# Altium PCB Multivib_Sheet1.PcbDoc
Units mil, origin at the board's own origin, x right, y up, seen from the top; angles counter-clockwise.
Board outline 1000 x 1300 mil, 2 copper layers (Top Layer, Bottom Layer); 11 components, 6 nets, 24 pads, 2 vias.
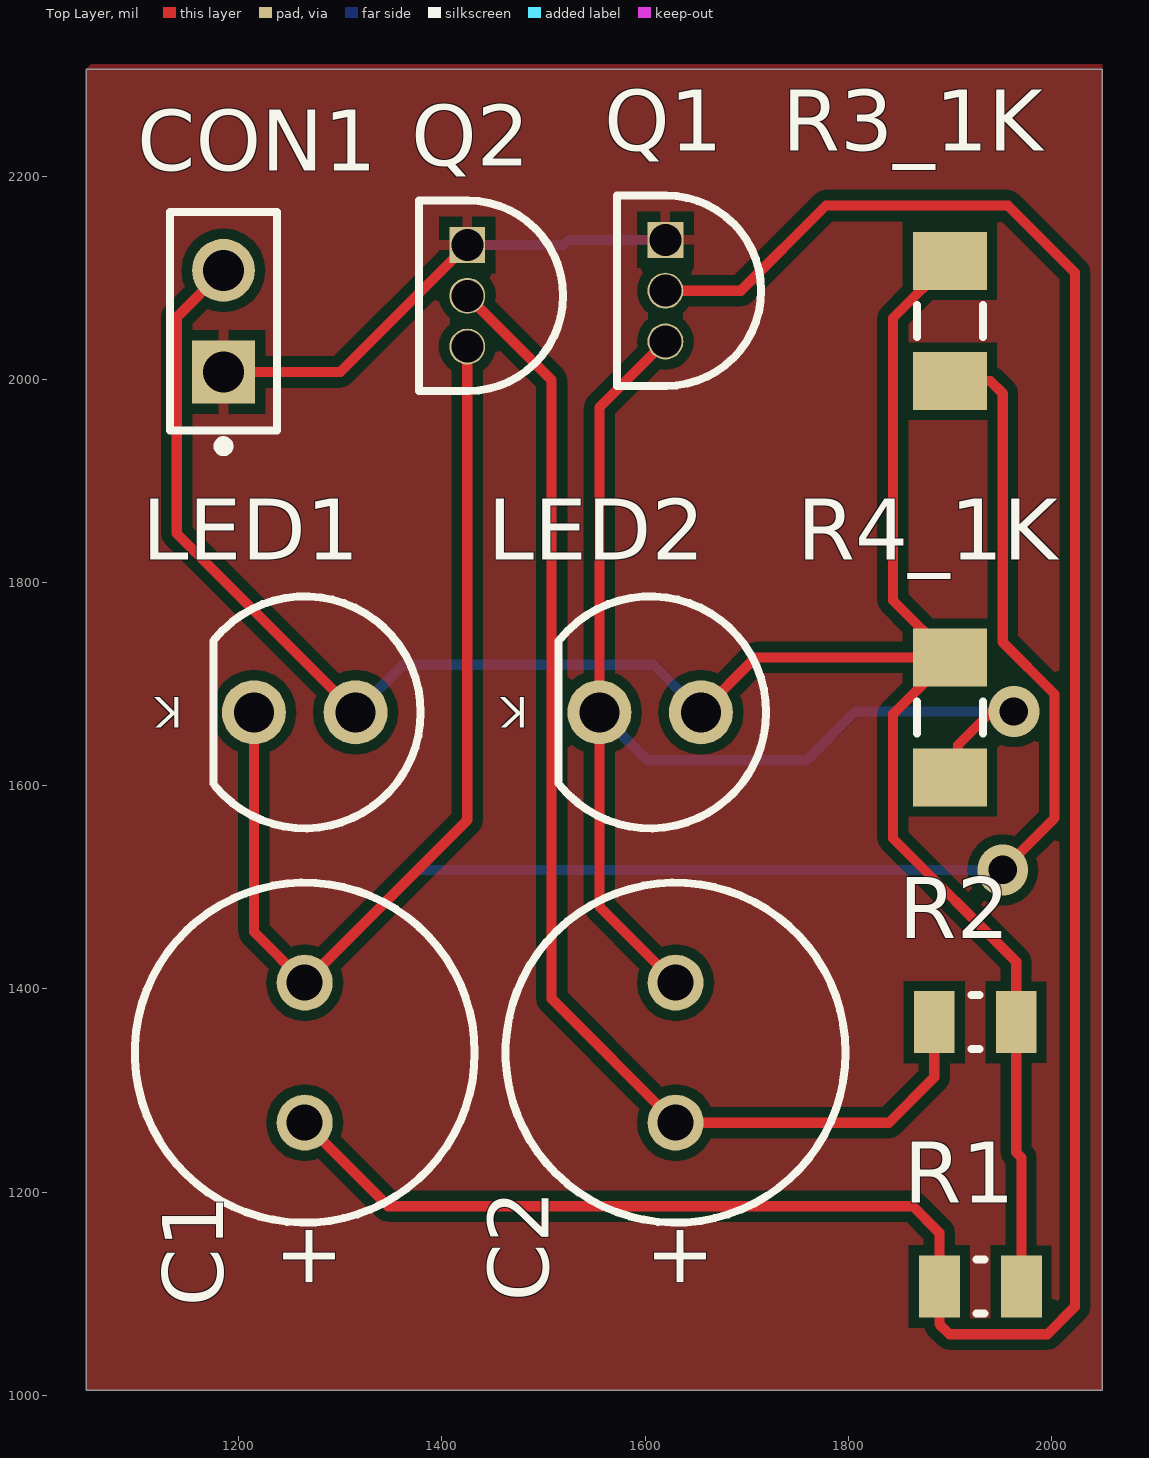
[diagram p0: Top Layer view]
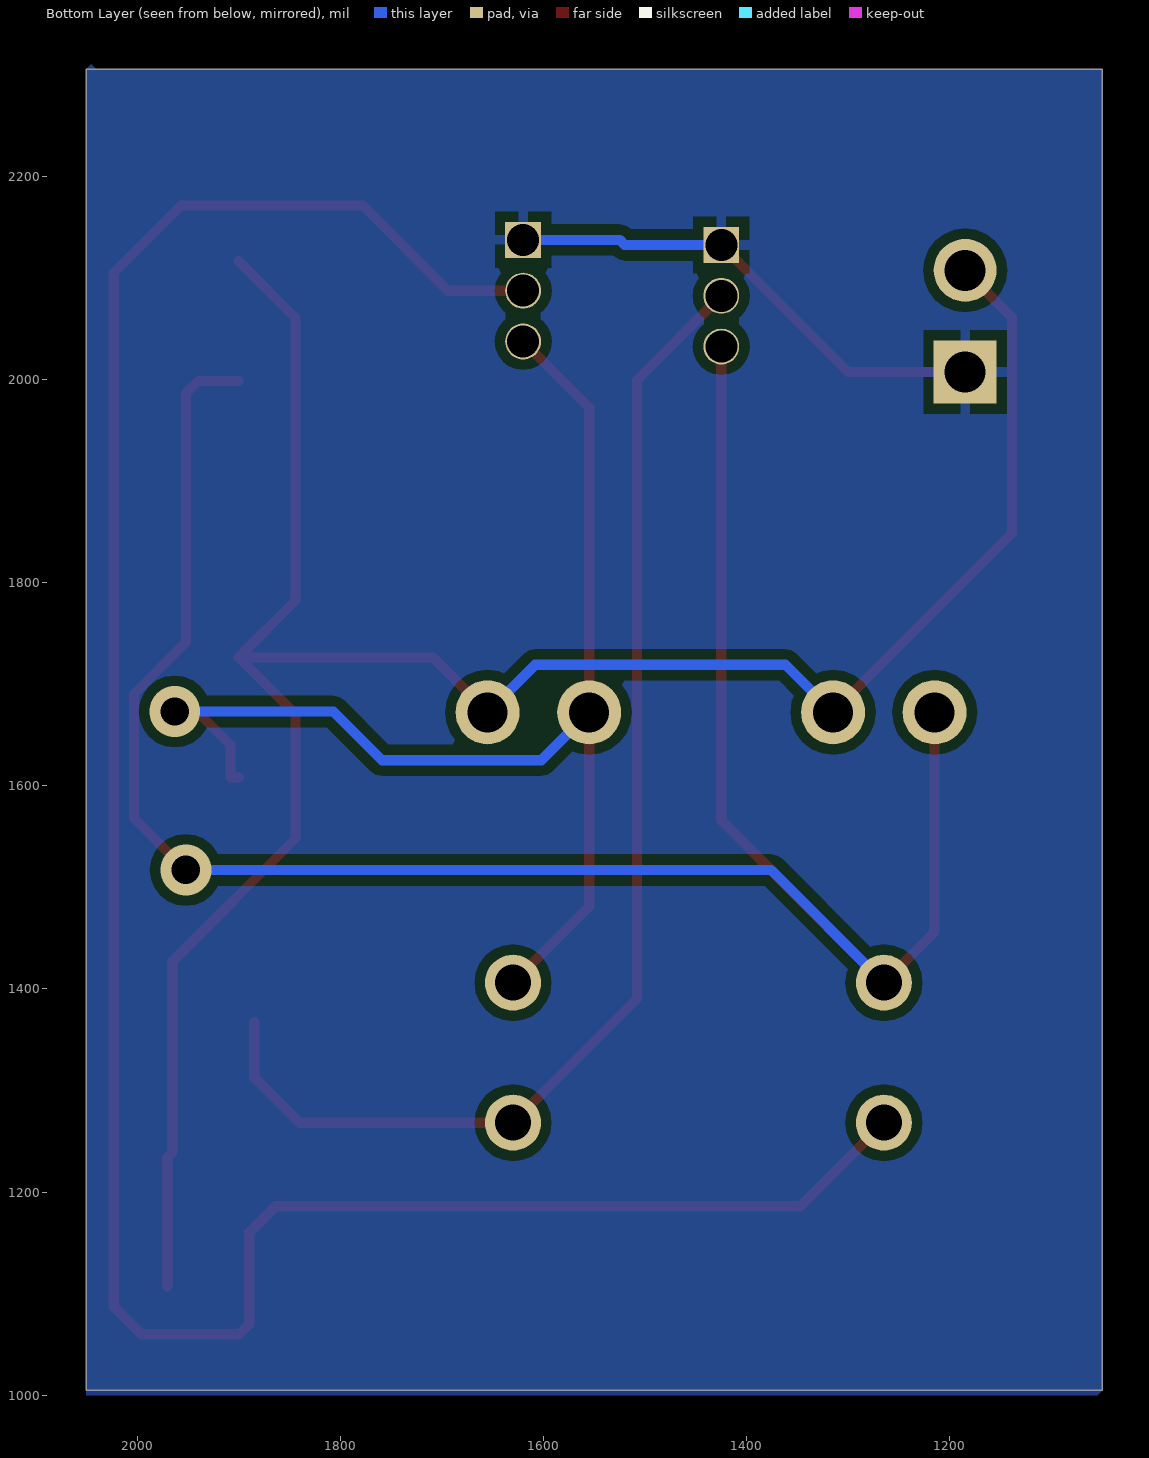
[diagram p1: Bottom Layer view, seen from below]

## Layer stack, top to bottom
Top Solder: solder mask 0.4, Solder Resist, Dk 3.5
Top Layer: signal copper 1.4
Dielectric 1: dielectric 12.6, FR-4, Dk 4.8
Bottom Layer: signal copper 1.4
Bottom Solder: solder mask 0.4, Solder Resist, Dk 3.5

## Board outline
1050,1005 2050,1005 2050,2305 1050,2305

## Design rules (kind name [scope] priority, off if disabled: settings)
Clearance [All] p1: gap=10 ignorepadtopadclearanceinfootprint=FALSE except(0: Arc-Hole Track-Hole SMDPad-Hole THPad-Hole Via-Hole Fill-Hole Poly-Hole Region-Hole Text-Hole)
PolygonConnect [All] p1: connectstyle=Relief reliefconductorwidth=10 reliefentries=4 polygonreliefangle="90 Angle" airgapwidth=10
RoutingVias [All] p1: holewidth=28 width=50 viastyle="Through Hole" minholewidth=28 minwidth=50 maxholewidth=28 maxwidth=50
SolderMaskExpansion [All] p1: expansion=4
Width [All] p1: maxlimit=10 minlimit=10 preferedwidth=10
30 further rules are at their usual default settings.

## Components (designator, comment, footprint, x,y, rotation, side; value= is the part's Value field where it differs from the comment)
C1 "ECA-1VM221" PNSC-ECA-1VM221-2 1265,1337.17 r90 top
C2 "ECA-1VM221" PNSC-ECA-1VM221-2 1630,1337.17 r90 top
CON1 "TSW-102-07-L-S" FP-TSW-102-07-L-S-MFG 1185,2057.17 r90 top
LED1 "151051RS11000" "Type 5mm" 1265,1672.17 r180 top
LED2 "151051RS11000" "Type 5mm" 1605,1672.17 r180 top
Q1 "2N3904BU" FAIR-TO-92 1620,2137.17 r270 top
Q2 "2N3904BU" FAIR-TO-92 1425,2132.17 r270 top
R1 "5k" RESC2013X50X30ML20T20 1930,1107.17 r0 top
R2 "5k" RESC2013X50X30ML20T20 1925,1367.17 r0 top
R3_1K "" RESC3216X65X50ML15T25 1900,2057.17 r90 top
R4_1K "" RESC3216X65X50ML15T25 1900,1667.17 r90 top

## Footprints (in the part's own frame and the unit in brackets; to place one, negate y for a bottom-side part, rotate by r counter-clockwise, add the part's x,y. Pads: shape width x height; smd on the part's side, far side on the other; paste and mask are expansions set on the pad)
FAIR-TO-92 [mm] "TO, 3-Leads, Body Dia 4.79mm, Pitch 1.27mm"
  rect 0.898x0.898 hole 0.8 mask+0.05: 1(0,0)
  round 0.898 hole 0.8 mask+0.05: 2(1.27,0) 3(2.54,0)
  silkscreen extent -1.11,-1.21 3.65,2.4, body extent -1.11,-1.21 3.65,2.4, height 5.33
FP-TSW-102-07-L-S-MFG [mm]
  rect 1.57x1.57 hole 1.02 paste-1000 mask+0: 1(-1.27,0)
  round 1.57 hole 1.02 paste-1000 mask+0: 2(1.27,0)
  silkscreen extent -3.25,-1.34 2.73,1.34, body extent -2.83,-1.44 2.83,1.44, height 0.25
PNSC-ECA-1VM221-2 [mm] "THD, 2-Leads, Dia 8.5mm, Body Length 12.5mm, Pin Spacing 3.5mm"
  round 1.4 hole 0.9: 1(-1.75,0) 2(1.75,0)
  silkscreen extent -4.25,-4.25 4.25,4.25, body extent -4.25,-4.25 4.25,4.25, height 12.5
RESC2013X50X30ML20T20 [mm] "Chip Resistor, 2-Leads, Body 2.00x1.25mm, IPC Low Density"
  rect 1.021x1.55 smd: 1(-1.025,0) 2(1.025,0)
  silkscreen extent -0.1,-0.68 0.1,0.67, body extent -1.1,-0.72 1.1,0.72, height 0.5
RESC3216X65X50ML15T25 [mm] "Chip Resistor, 2-Leads, Body 3.20x1.60mm, IPC Low Density"
  rect 1.45x1.85 smd: 1(-1.5,0) 2(1.5,0)
  silkscreen extent -0.4,-0.82 0.4,0.82, body extent -1.68,-0.87 1.68,0.87, height 0.65
"Type 5mm" [mm] "THT, LED-5mm, 2pin- Body 5.8mm"
  round 1.6 hole 1: 1(1.27,0) 2(-1.27,0)
  silkscreen extent -2.9,-2.9 2.29,2.9, body extent -2.9,-2.9 2.5,2.9, height 11.7

## Part data
C1 C2: library part CMP-2000-05311-1, "Aluminum Electrolytic Capacitor, 220 uF, +/- 20%, 35 V, -40 to 85 degC, 2-Pin THD, RoHS, Bulk", Capacitance=220µF, Case/Package=Radial, Case Size/Dimension=Ø8x11.5mm, Dielectric Material=Aluminium, Leakage Current=3uA, Lifetime@Temperature=2000Hrs@85degC, Manufacturer=Panasonic, Manufacturer Part Number 1=ECA1VM221, Max Operating Temperature=85°C, Min Operating Temperature=-40°C, Operating Temp-Max=85degC, Operating Temp Range=-40to+85degC, Package Description="2-Pin Axial Lead, Dia 8 mm, Body Length 12.5 mm", Package Quantity=200, Rated Voltage=35V, Ripple Current=350mA, Supplier Part Number 1=P5166-ND, Tolerance=20%, Category="Aluminum Electrolytic Capacitors", ComponentLink1Description=https://datasheet.ciiva.com/11777/0900766b800274c2-11777872.pdf?src-supplier=RSComponents, ComponentLink1URL=https://datasheet.ciiva.com/11777/0900766b800274c2-11777872.pdf?src-supplier=RSComponents, ComponentLink2Description=https://datasheet.ciiva.com/26341/441851-da-01-en-elko-eca1vm221-m-r-220myf-35v-85c-26341906.pdf?src-supplier=Conrad, ComponentLink2URL=https://datasheet.ciiva.com/26341/441851-da-01-en-elko-eca1vm221-m-r-220myf-35v-85c-26341906.pdf?src-supplier=Conrad, ComponentLink3Description=https://datasheet.ciiva.com/24023/aba0000ce12-465472-24023260.pdf?src-supplier=Mouser, ComponentLink3URL=https://datasheet.ciiva.com/24023/aba0000ce12-465472-24023260.pdf?src-supplier=Mouser, ComponentLink4Description=https://datasheet.ciiva.com/14590/70067785-14590042.pdf?src-supplier=Allied+Electronics, ComponentLink4URL=https://datasheet.ciiva.com/14590/70067785-14590042.pdf?src-supplier=Allied+Electronics, ComponentLink5Description=https://datasheet.ciiva.com/14601/70067785-14601242.pdf?src-supplier=Allied+Electronics, ComponentLink5URL=https://datasheet.ciiva.com/14601/70067785-14601242.pdf?src-supplier=Allied+Electronics, ComponentLink6Description=https://datasheet.ciiva.com/43485/aba0000ce12-43485334.pdf?src-supplier=Farnell, ComponentLink6URL=https://datasheet.ciiva.com/43485/aba0000ce12-43485334.pdf?src-supplier=Farnell, ComponentLink7Description=https://datasheet.ciiva.com/46387/1907780-46387398.pdf?src-supplier=Element14, ComponentLink7URL=https://datasheet.ciiva.com/46387/1907780-46387398.pdf?src-supplier=Element14, ComponentLink8Description=https://datasheet.ciiva.com/2983/aba0000ce12-2983864.pdf?src-supplier=Avnet, ComponentLink8URL=https://datasheet.ciiva.com/2983/aba0000ce12-2983864.pdf?src-supplier=Avnet, ComponentLink9Description=https://datasheet.ciiva.com/16426/aba0000ce12-16426383.pdf?src-supplier=Future+Electronics, ComponentLink9URL=https://datasheet.ciiva.com/16426/aba0000ce12-16426383.pdf?src-supplier=Future+Electronics, ComponentLink10Description=https://datasheet.ciiva.com/15166/getdatasheetpartid-178468-15166214.pdf?src-supplier=Verical, ComponentLink10URL=https://datasheet.ciiva.com/15166/getdatasheetpartid-178468-15166214.pdf?src-supplier=Verical, ComponentLink11Description=https://datasheet.ciiva.com/17356/aba0000ce12-17356350.pdf?src-supplier=Avnet+Europe, ComponentLink11URL=https://datasheet.ciiva.com/17356/aba0000ce12-17356350.pdf?src-supplier=Avnet+Europe, Construction=RADIAL, Contact Plating=Tin, Datasheet URL=https://datasheet.ciiva.com/26341/441851-da-01-en-elko-eca1vm221-m-r-220myf-35v-85c-26341906.pdf, Datasheet Version=Mar-06, Diameter=8mm, Dissipation Factor=0.14%, Height=11.5mm, Height - Seated (Max)=0.492inch, Lead/Base Style=Straight, Lead Diameter=0.6mm, Lead Free="Lead Free", Lead Pitch=3.5mm, Length=11.5mm, Life (Hours)=2000Hour, Manufacturer 1=Panasonic, Manufacturer URL=http://www.panasonic.com/, Mount="Through Hole,PCB", Number of Pins=2, Package Reference=ECA-1VM221, Packaging=Bulk, Polarity=Polar, Pricing 1="1=0.43000, 10=0.29600, 50=0.20700, 100=0.17740, 500=0.13304, 1000=0.11234, 2500=0.10642, 5000=0.10051 (USD)", Radiation Hardening=No, REACH SVHC="No SVHC", Ripple Current (AC)=350mA, RoHS=Yes, RoHS Compliant=Yes, Series=M, Stock 1=390, Supplier 1=Digi-Key, Termination=Radial, Type=Radial, Voltage=35V, Voltage Rating=35V, Voltage Rating (DC)=35V
CON1: library part CMP-02766-001428-1, "CONN HEADER VERT 2POS 2.54MM", Color=Black, Current Rating=7.6A, Manufacturer 1=Samtec, Max Operating Temperature=125°C, Max Voltage Rating (AC)=550V, Min Operating Temperature=-55°C, Package Quantity=1, Supplier Part Number 1=SAM1031-02-ND, Category=Connectors, ComponentLink1Description=https://datasheet.ciiva.com/25616/0900766b81154476-25616838.pdf?src-supplier=RSComponents, ComponentLink1URL=https://datasheet.ciiva.com/25616/0900766b81154476-25616838.pdf?src-supplier=RSComponents, ComponentLink2Description=https://datasheet.ciiva.com/10281/htsw-th-10281275.pdf?src-supplier=Avnet, ComponentLink2URL=https://datasheet.ciiva.com/10281/htsw-th-10281275.pdf?src-supplier=Avnet, ComponentLink3Description=https://datasheet.ciiva.com/16734/htsw-th-16734221.pdf?src-supplier=Avnet+Europe, ComponentLink3URL=https://datasheet.ciiva.com/16734/htsw-th-16734221.pdf?src-supplier=Avnet+Europe, ComponentLink4Description=https://datasheet.ciiva.com/6889/tsw-xxx-xx-xxx-x-xx-xxx-mkt-6889246.pdf?src-supplier=Digi-Key, ComponentLink4URL=https://datasheet.ciiva.com/6889/tsw-xxx-xx-xxx-x-xx-xxx-mkt-6889246.pdf?src-supplier=Digi-Key, ComponentLink5Description=https://datasheet.ciiva.com/22677/1596380-22677790.pdf?src-supplier=Element14, ComponentLink5URL=https://datasheet.ciiva.com/22677/1596380-22677790.pdf?src-supplier=Element14, Connector Type="Male Pin", Contact Material=Bronze, Contact Mating Length=0.23inch, Contact Plating=Gold, Contact Type="Male Pin", Depth=2.54mm, Gender=Male, Housing Color=Black, Housing Material=Polyester, Lead Free="Lead Free", Length=5.08mm, Manufacturer Part Number 1=TSW-102-07-L-S, Max Current Rating=7.6A, Mount="Through Hole", Number of Contacts=2, Number of Positions=2, Number of Rows=1, Orientation=Straight, Packaging=Bulk, Pitch=2.54mm, Pricing 1="1=0.25000, 10=0.23200, 25=0.19800, 50=0.17340, 100=0.16100, 250=0.14240, 500=0.13622 (USD)", Radiation Hardening=No, REACH SVHC="No SVHC", RoHS=Yes, RoHS Compliant=Yes, Series=TSW, Stock 1=9026, Supplier 1=Digi-Key, Termination=Solder, Voltage Rating=550V, Width=2.54mm
LED1 LED2: library part CMP-1488-00008-1, "THT LED round mono-color color lens, WL-TMRW, Red", Emitting Color=Red, Manufacturer="Wuerth Elektronik", ComponentLink1Description="Manufacturer URL", ComponentLink1URL=http://www.we-online.com, ComponentLink2Description=Datasheet, ComponentLink2URL=http://katalog.we-online.de/pbs/datasheet/7448042001.pdfhttp://katalog.we-online.de/pbs/datasheet/7448042001.pdfhttp://katalog.we-online.de/pbs/datasheet/7448042001.pdfhttp://katalog.we-online.de/pbs/datasheet/151051RS11000.pdf, PackageReference="Type 5mm", PartNumber=151051RS11000
Q1 Q2: library part CMP-2000-04944-1, "NPN General-Purpose Amplifier, 40 V VCEO, 0.2 A, -55 to 150 degC, 2-Pin TO-92, RoHS, Bulk", Case/Package=TO-92, Collector Base Voltage (VCBO)=60V, Collector Emitter Breakdown Voltage=40V, Collector Emitter Saturation Voltage=300mV, Current Rating=200mA, Emitter Base Voltage (VEBO)=6V, Frequency=300MHz, Manufacturer=FairchildSemiconductor, Manufacturer 1="ON Semiconductor / Fairchild", Maximum Collector Emitter Saturation Voltage=0.2@1mA@10mA, Maximum DC Collector Current=0.2A, Maximum Operating Frequency=300(Min)MHz, Maximum Power Dissipation=625mW, Max Operating Temperature=150°C, Minimum DC Current Gain=40@0.1mA@1V, Min Operating Temperature=-55°C, Operating Temperature=-55to150degC, Package=3TO-92, Package Description="3-Pin Transistor Outline Package, Body Dia 4.79 mm, Pitch 1.27 mm", Package Quantity=1000, Supplier Part Number 1=8431575, Category=GPBJT, Collector Emitter Voltage (VCEO)=40V, ComponentLink1Description=https://datasheet.ciiva.com/15139/getdatasheetpartid-185752-15139727.pdf?src-supplier=Verical, ComponentLink1URL=https://datasheet.ciiva.com/15139/getdatasheetpartid-185752-15139727.pdf?src-supplier=Verical, ComponentLink2Description=https://datasheet.ciiva.com/19459/783421-19459422.pdf?src-supplier=Jameco, ComponentLink2URL=https://datasheet.ciiva.com/19459/783421-19459422.pdf?src-supplier=Jameco, ComponentLink3Description=https://datasheet.ciiva.com/26229/mmbt3904-26229800.pdf?src-supplier=Avnet+Europe, ComponentLink3URL=https://datasheet.ciiva.com/26229/mmbt3904-26229800.pdf?src-supplier=Avnet+Europe, ComponentLink4Description=https://datasheet.ciiva.com/972/mmbt3904-972165.pdf?src-supplier=Digi-Key, ComponentLink4URL=https://datasheet.ciiva.com/972/mmbt3904-972165.pdf?src-supplier=Digi-Key, Datasheet URL=https://datasheet.ciiva.com/4722/2n3904-82270-4722369.pdf, Datasheet Version="Rev. 1.1.0, 10/2014", Element Configuration=Single, Gain Bandwidth Product=300MHz, Height=5.33mm, hFE Min=100, Lead Free="Lead Free", Length=5.2mm, Manufacturer Part Number 1=2N3904BU, Manufacturer URL=https://www.fairchildsemi.com/, Max Collector Current=200mA, Max Frequency=300MHz, Maximum Collector Base Voltage=60V, Maximum Collector Emitter Voltage=40V, Max Power Dissipation=625mW, Mount="Through Hole", Mounting=ThroughHole, Number of Elements=1, Number of Pins=3, Package Reference=TO-92, Packaging=Bulk, Pin Count=3, Polarity=NPN, Power Dissipation=625mW, Pricing 1="50=0.24800, 2500=0.17900 (GBP)", Rad Hard=No, Radiation Hardening=No, REACH SVHC="No SVHC", RoHS=Yes, RoHS Compliant=Yes, Stock 1=1200, Supplier 1=RSComponents, Transition Frequency=300MHz, Type=NPN, Voltage Rating (DC)=60V, Weight=0.179g, Width=4.19mm
R1 R2: library part CMP-2001-04239-1, "Res Thick Film 0805 5K Ohm 1% 1/8W ±100ppm/°C Molded SMD SMD Paper T/R", Manufacturer="Vishay Dale", Part Number=CRCW08055K00FKTA
R3_1K R4_1K: library part CMP-2003-04643-1, Case/Package=1206, Case Code (Metric)=3216, Manufacturer="Vishay Dale", Manufacturer Part Number 1=TNPW12061K00BEEN, Max Operating Temperature=125°C, Max Power Dissipation=250mW, Min Operating Temperature=-55°C, Package Quantity=1000, Resistance=1kR, Resistance Tolerance=0.1%, Resistor Type="Thin Film", Temperature Coefficient=25ppm/°C, Voltage Rating=200V, Case Code (Imperial)=1206, Category="Chip SMD Resistors", ComponentLink1Description=https://datasheet.ciiva.com/16383/tnpw-e3-16383541.pdf?src-supplier=Future+Electronics, ComponentLink1URL=https://datasheet.ciiva.com/16383/tnpw-e3-16383541.pdf?src-supplier=Future+Electronics, ComponentLink2Description=https://datasheet.ciiva.com/9112/tnpw-e3-9112166.pdf?src-supplier=Avnet, ComponentLink2URL=https://datasheet.ciiva.com/9112/tnpw-e3-9112166.pdf?src-supplier=Avnet, ComponentLink3Description=https://datasheet.ciiva.com/2613/tnpw-e3-2613406.pdf?src-supplier=Digi-Key, ComponentLink3URL=https://datasheet.ciiva.com/2613/tnpw-e3-2613406.pdf?src-supplier=Digi-Key, Construction=Rectangular, Contact Plating=Tin, Depth=1.6mm, Features="Moisture Resistant,Automotive AEC-Q200,Anti-Sulfur", Height=0.026inch, Lead Free="Lead Free", Length=0.126inch, Manufacturer 1="Vishay Dale", Military Standard=Not, Number of Pins=2, Number of Terminations=2, Packaging="Tape and Reel", Part Number=TNPW12061K00BEEN, Power Rating=250mW, Pricing 1="1000=0.21049 (USD)", Radiation Hardening=No, REACH SVHC=Unknown, RoHS=Yes, RoHS Compliant=Yes, Series=TNPW, Size Code=1206, Stock 1=3000, Supplier 1=Avnet, Supplier Part Number 1=TNPW12061K00BEEN, Termination=SMD/SMT, Tolerance=0.1%, Voltage Rating (DC)=200V, Width=0.063inch

## Via types
v1: diameter 50, hole 28, Top Layer to Bottom Layer, 2 vias

## Nets (pads, with @x,y where several pads share a name; then routed paths per layer and width w, separated by ;. In a path a pad name is that pad's centre, name@x,y a point inside that pad or via, vN(x,y) a via of type N, cw(c..) or ccw(c..) an arc to the next point about the centre after c; other vN are vias at no path point)
GND: CON1.1 Q1.1 Q2.1 | length 488.8
  Top Layer w10: CON1.1 1300,2007.17 Q2.1
  Bottom Layer w10: Q2.1 1520,2132.17 1525,2137.17 Q1.1
NetC1_1: C1.1 Q1.2 R1.1 | length 2391.2
  Top Layer w10: C1.1 1347.27,1186 1863.65,1186 1889.65,1160 R1.1 1889.65,1070 1899.65,1060 1996,1060 2023,1087 2023,2105 1957,2171 1778,2171 1694.17,2087.17 Q1.2
NetC1_2: C1.2 LED1.1 Q2.3 R3_1K.1 | length 2280.5
  Top Layer w10: LED1.1 1215,1456.06 C1.2 1425,1566.06 Q2.3 ; R3_1K.1 1940,1998.11 1952,1986.11 1952,1741.26 2003,1690.26 2003,1568 v1(1952,1517)
  Bottom Layer w10: C1.2 1375.94,1517 v1(1952,1517)
NetC2_1: C2.1 Q2.2 R2.1 | length 1226.2
  Top Layer w10: Q2.2 1508,1999.17 1508,1390.27 C2.1 1840,1268.27 1884.65,1312.91 R2.1
NetC2_2: C2.2 LED2.1 Q1.3 R4_1K.1 | length 1245.1
  Top Layer w10: Q1.3 1555,1972.17 LED2.1 1555,1481.06 C2.2 ; R4_1K.1 1908,1608.11 1908,1640 1941,1673 v1(1963,1673)
  Bottom Layer w10: LED2.1 1602.17,1625 1759,1625 1807,1673 v1(1963,1673)
NetCON1_2: CON1.2 LED1.2 LED2.2 R1.2 R2.2 R3_1K.2 R4_1K.2 | length 2304.1
  Top Layer w10: CON1.2 1139,2061.17 1139,1848.17 LED1.2 ; LED2.2 1709.05,1726.22 R4_1K.2 ; R3_1K.2 1844,2060.22 1844,1782.22 R4_1K.2 ; R1.2 1970.35,1234 1965.35,1239 R2.2 1965.35,1426.65 1844,1548 1844,1670.22 R4_1K.2
  Bottom Layer w10: LED1.2 1361.83,1719 1608.17,1719 LED2.2

## Polygon pours and split planes (outlines as drawn)
GND on Top Layer "GND_L01_P004" (solid, pour order 4): 1050,2305 1055,2310 2050,2310 2050,1005 1050,1005
GND on Bottom Layer "GND_L02_P006" (solid, pour order 6): 1050,2305 2040,2305 2045,2310 2050,2305 2050,1000 1055,1000 1050,1005

## Silkscreen, mask and mechanical layers (free items; w line width, h text height)
Mechanical 1:
  lines w10: 1840,2265 1845,2260 ; 2050,1005 1050,1005 1050,2305 2050,2305 ; 2050,1010 2050,2300

## Text inside footprints (layer, text, board x,y; h text height)
C1: Top Overlay "+" at 1295,1102.17 h60 r90
C2: Top Overlay "+" at 1660,1102.17 h60 r90
LED1: Top Overlay "K" at 1145,1687.17 h30 r180; Mechanical 15 "K" at 1145,1687.17 h30 r180
LED2: Top Overlay "K" at 1485,1687.17 h30 r180; Mechanical 15 "K" at 1485,1687.17 h30 r180